# Altium PCB led.PcbDoc
Units mm, origin at the board's own origin, x right, y up, seen from the top; angles counter-clockwise.
Board outline 20 x 20 mm, 2 copper layers (Top Layer, Bottom Layer), stack 1.671 mm thick; 5 components, 4 nets, 12 pads, 1 vias.
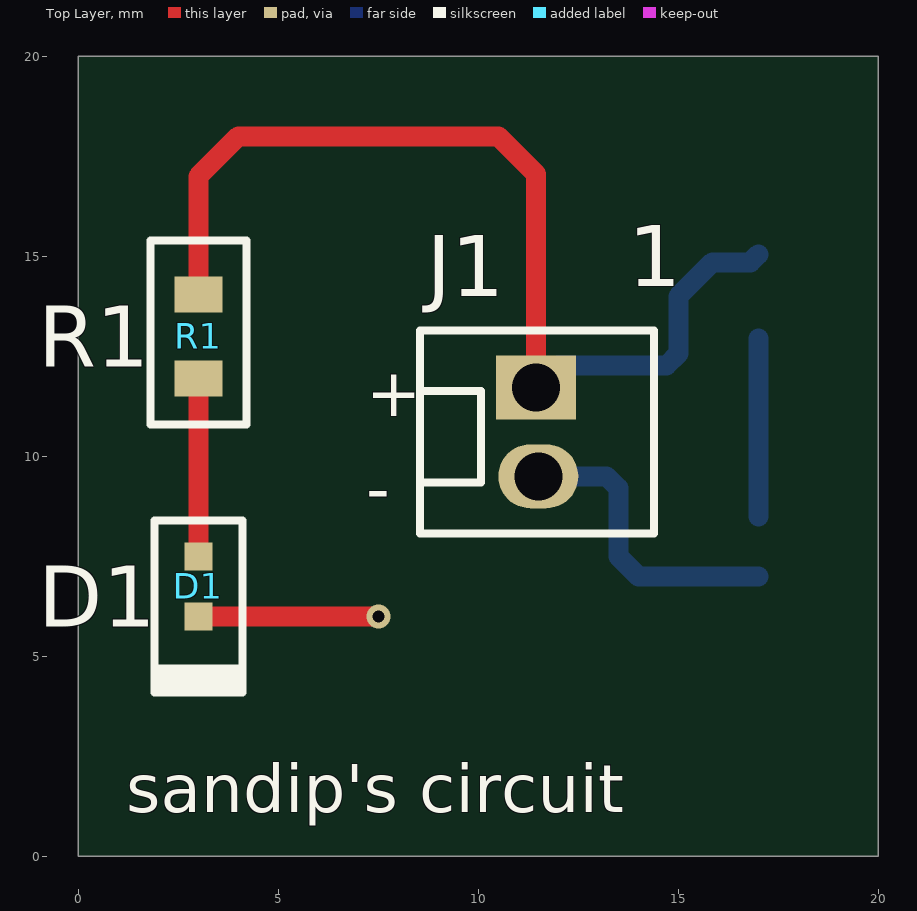
[diagram p0: Top Layer view]
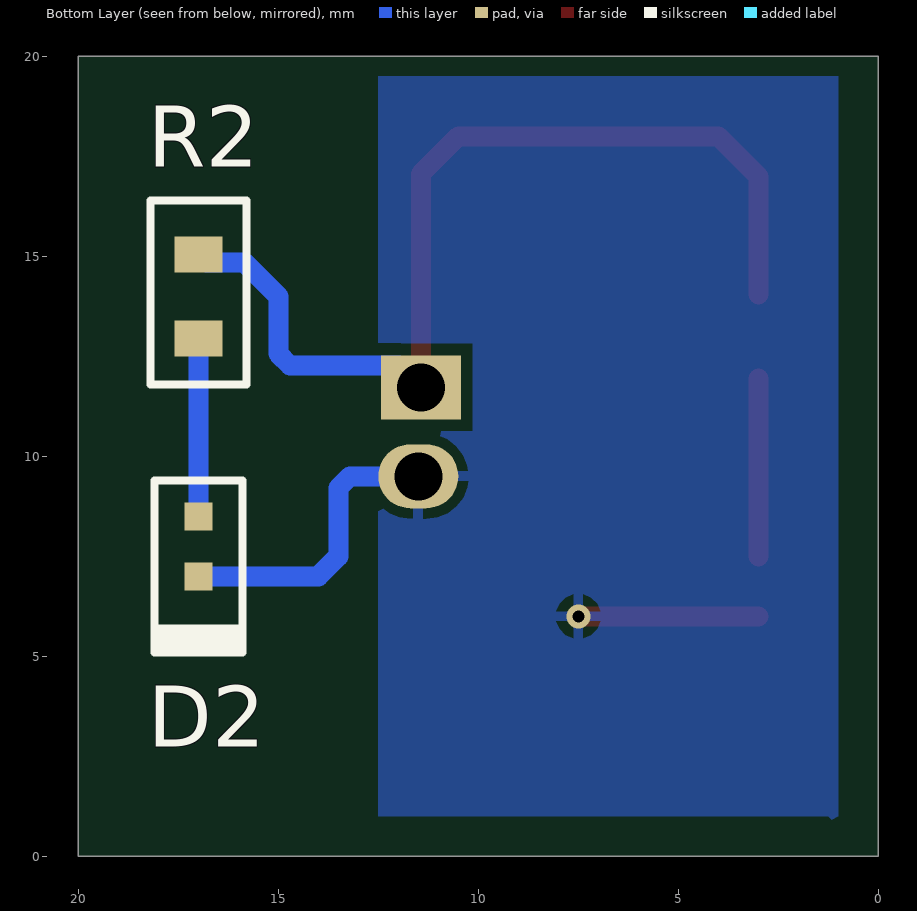
[diagram p1: Bottom Layer view, seen from below]
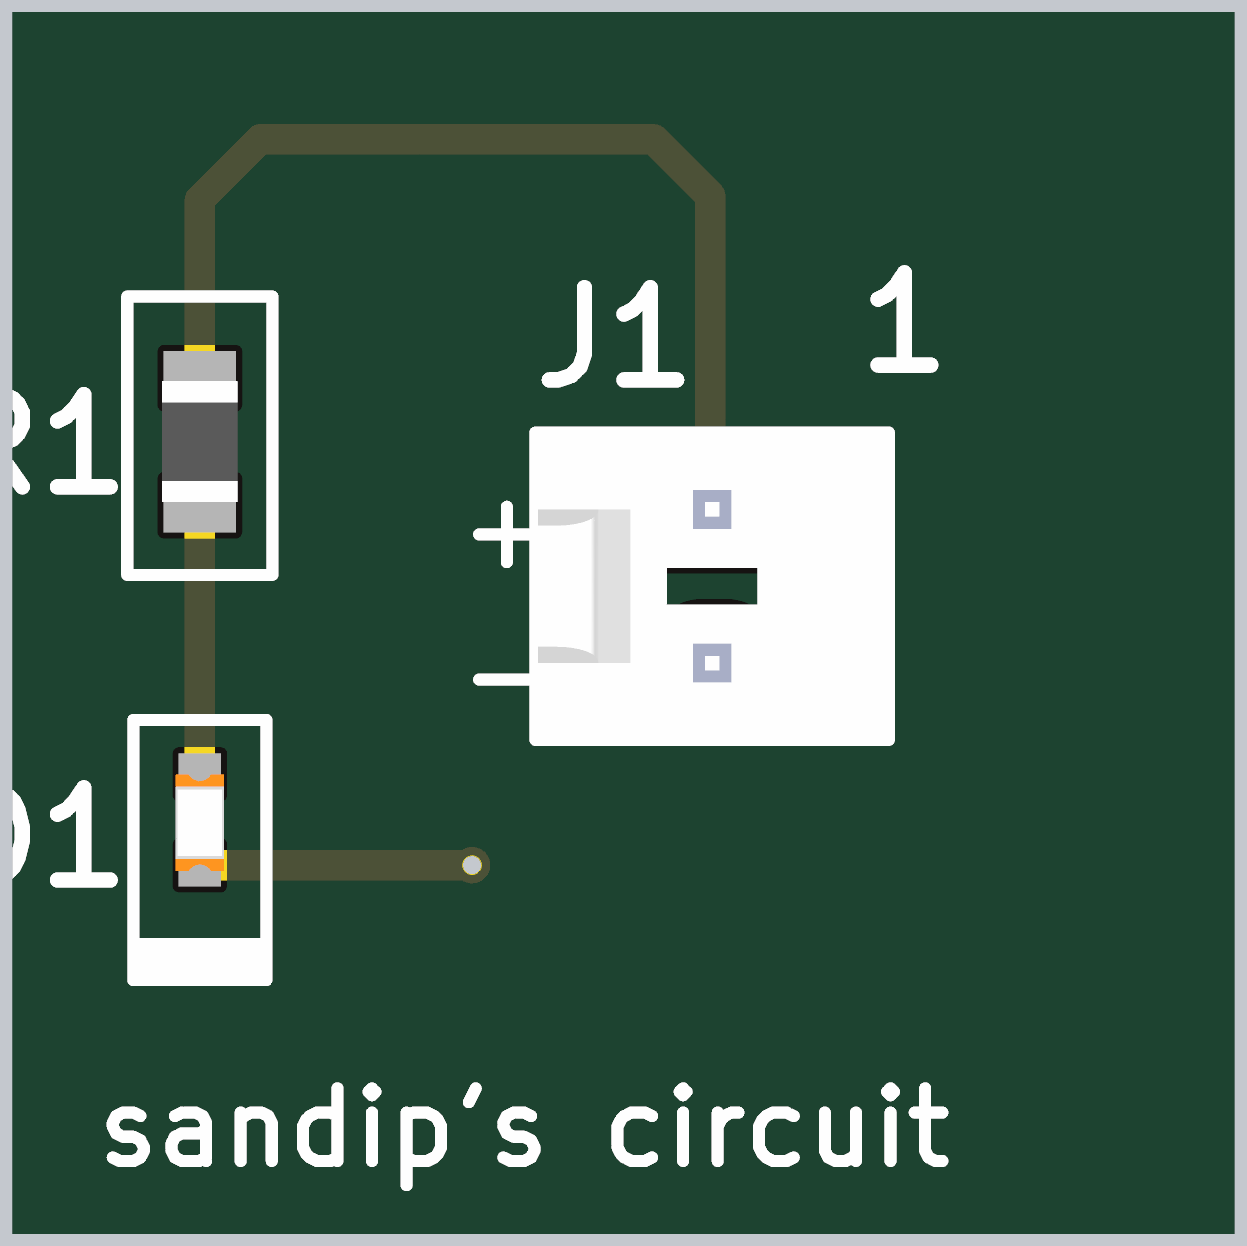
[diagram p2: 3D render of the assembled board from above, using the file's embedded part models]

## Layer stack, top to bottom
Top Solder: solder mask 0.0102, Solder Resist, Dk 3.5
Top Layer: signal copper 0.0356
Dielectric 1: dielectric 1.6, FR-4, Dk 4.8
Bottom Layer: signal copper 0.0356
Bottom Solder: solder mask 0.0102, Solder Resist, Dk 3.5

## Board outline
0,0 20,0 20,20 0,20

## Design rules (kind name [scope] priority, off if disabled: settings)
Clearance [All] p1: gap=0.3 ignorepadtopadclearanceinfootprint=FALSE
PolygonConnect [All] p1: connectstyle=Relief reliefconductorwidth=0.254 reliefentries=4 polygonreliefangle="90 Angle" airgapwidth=0.254
RoutingVias [All] p1: holewidth=0.3 width=0.6 viastyle="Through Hole" minholewidth=0.3 minwidth=0.6 maxholewidth=0.3 maxwidth=0.6
SilkToSolderMaskClearance [IsPad] p1: minsilkscreentomaskgap=0.1 clearancetoexposedcopper=TRUE
SolderMaskExpansion [All] p1: expansion=0.102 istentingtop=FALSE
Width [All] p1: maxlimit=1 minlimit=0.3 preferedwidth=0.5
29 further rules are at their usual default settings.

## Components (designator, comment, footprint, x,y, rotation, side; value= is the part's Value field where it differs from the comment)
D1 "GREEN" LED0603G 3,6.7 r90 top
D2 "GREEN" LED0603G 17,7.7 r90 bottom
J1 "1x2 Header" HDR1x2 11.436,11.722 r0 top
R1 "360R" "R0805 - duplicate" 3,13 r90 top
R2 "360R" "R0805 - duplicate" 17,14 r90 bottom

## Footprints (in the part's own frame and the unit in brackets; to place one, negate y for a bottom-side part, rotate by r counter-clockwise, add the part's x,y. Pads: shape width x height; smd on the part's side, far side on the other; paste and mask are expansions set on the pad)
HDR1x2 [mm]
  rect 2x1.6 hole 1.2: 1(0,0) 1(0,0)
  oval 2x1.6 hole 1.2: 2(0.064,-2.222) 2(0.064,-2.222)
  silkscreen extent -2.89,-3.65 2.95,1.43, body extent -2.85,-3.65 2.95,1.43, height 11.07
LED0603G [mm]
  rect 0.7x0.7 smd: 1(-0.7,0) 2(0.8,0)
  silkscreen extent -2.6,-1.1 1.7,1.1, body extent -0.8,-0.4 0.8,0.4, height 0.59
"R0805 - duplicate" [mm]
  rect 0.9x1.2 smd: 1(-1.05,0) 2(1.05,0)
  silkscreen extent -2.2,-1.2 2.4,1.2, body extent -1,-0.63 1,0.63, height 0.61

## Part data
D1 D2: library part LSM0603453V, "LED GREEN CLEAR CHIP 0603 SMD", Forward Current=20mA, Manufacturer="Visual Communications", Max Operating Temperature=85°C, Min Operating Temperature=-40°C, Power Dissipation=60mW, Reverse Voltage=5V, Supplier Part Number=LSM0603453VCT-ND, Category=LEDs, ComponentLink1Description=http://www.farnell.com/datasheets/2699708.pdf?src-supplier=Farnell, ComponentLink1URL=http://www.farnell.com/datasheets/2699708.pdf?src-supplier=Farnell, ComponentLink2Description=http://www.farnell.com/datasheets/2699708.pdf?src-supplier=Newark, ComponentLink2URL=http://www.farnell.com/datasheets/2699708.pdf?src-supplier=Newark, ComponentLink3Description=https://vcclite.com/wp-content/uploads/wpallimport/files/files/LSM0603453V.pdf?src-supplier=Digi-Key, ComponentLink3URL=https://vcclite.com/wp-content/uploads/wpallimport/files/files/LSM0603453V.pdf?src-supplier=Digi-Key, Manufacturer Part Number=LSM0603453V, Pricing="1=0.39, 10=0.242, 100=0.1394, 1000=0.10908, 2000=0.09999 (USD)", RoHS=Yes, Stock=93994, Supplier=Digi-Key, Wavelength=576nm
J1: library part 22-27-2021, "CONN HEADER VERT 2POS 2.54MM", Current Rating=4A, Flammability Rating="UL94 V-0", Housing Color=Natural, Manufacturer=Molex, Package Quantity=24000, Supplier Part Number=WM4111-ND, Voltage Rating=500V, Voltage Rating (DC)=250V, Category="Headers and Wire Housings", Contact Gender=Male, Contact Material=Tin, Contact Plating=Tin, Contact Type=-, Gender=Male, Housing Material=Nylon, Lead Free="Lead Free", Manufacturer Part Number=22-27-2021, Material=Nylon, Number of Positions=2, Number of Rows=1, Packaging=Bulk, Pitch=2.54mm, Plating=154ConductorMaterial, Pricing="1=0.3, 10=0.245, 100=0.18, 1000=0.14317, 5000=0.12272, 10000=0.11453 (USD)", Reach SVHC Compliant=4187SVHC, RoHS=Yes, RoHS Compliant=Yes, Series=6410, Stock=107358, Supplier=Digi-Key, Termination="Through Hole", Weight=0.00769oz
R1 R2: library part AC0805FR-07360RL, "RES SMD 360 OHM 1% 1/8W 0805", Case/Package=0805, Manufacturer=Yageo, Max Operating Temperature=155°C, Max Power Dissipation=125mW, Min Operating Temperature=-55°C, Supplier Part Number=13-AC0805FR-07360RLTR-ND, Temperature Coefficient=100ppm/°C, Tolerance=1%, Category="Chip SMD Resistors", ComponentLink1Description=http://www.yageo.com/NewPortal/yageodocoutput?fileName=/pdf/R-Chip/PYu-AC_51_RoHS_L_6.pdf&src-supplier=Digi-Key, ComponentLink1URL=http://www.yageo.com/NewPortal/yageodocoutput?fileName=/pdf/R-Chip/PYu-AC_51_RoHS_L_6.pdf&src-supplier=Digi-Key, Features="Moisture Resistant,Automotive AEC-Q200", Height=0.024inch, Length=0.079inch, Manufacturer Part Number=AC0805FR-07360RL, Number of Terminations=2, Packaging="Tape and Reel", Pricing="5000=0.00699, 10000=0.00621, 25000=0.0054, 35000=0.00526, 50000=0.00491, 125000=0.00448 (USD)", RoHS=Yes, RoHS Compliant=Yes, Series=AC, Supplier=Digi-Key, Width=0.049inch

## Via types
v1: diameter 0.6, hole 0.3, Top Layer to Bottom Layer, tented both sides, 1 vias

## Nets (pads, with @x,y where several pads share a name; then routed paths per layer and width w, separated by ;. In a path a pad name is that pad's centre, name@x,y a point inside that pad or via, vN(x,y) a via of type N, cw(c..) or ccw(c..) an arc to the next point about the centre after c; other vN are vias at no path point)
+3V3: J1.1 R1.2 R2.2 | length 25.3
  Top Layer w0.5: R1.2 3,17 4,18 10.5,18 11.436,17.063 J1.1@11.436,11.722
  Bottom Layer w0.5: J1.1@11.436,11.722 11.987,12.273 14.707,12.273 15,12.565 15,14 15.85,14.85 16.8,14.85 R2.2
DIODE1: D1.2 R1.1 | length 4.4
  Top Layer w0.5: D1.2 R1.1
DIODE2: D2.2 R2.1 | length 4.4
  Bottom Layer w0.5: D2.2 R2.1
VCC: D1.1 D2.1 J1.2 | length 12
  Top Layer w0.5: D1.1 v1(7.5,6)
  Bottom Layer w0.5: J1.2@11.5,9.5 13.207,9.5 13.5,9.207 13.5,7.5 14,7 D2.1

## Polygon pours and split planes (outlines as drawn)
VCC on Bottom Layer "VCC_L02_P000" (solid, pour order 0): 1.159,0.909 1.25,1 12.5,1 12.5,19.5 1,19.5 1,1

## Silkscreen, mask and mechanical layers (free items; w line width, h text height)
Top Overlay:
  text "+" at 7.2,11 h1.2
  text "-" at 7.2,8.6 h1.2
  text "sandip's circuit" at 1.2,1.1 h1.2
Board:
  the board outline again, w0.2

## Text inside footprints (layer, text, board x,y; h text height)
J1: Top Overlay "1" at 13.754,14.254 h1.52